# Altium PCB RigadoBreakout_REV_3cbDoc.PcbDoc
Units mil, origin at the board's own origin, x right, y up, seen from the top; angles counter-clockwise.
Board outline 900 x 1080 mil, 4 copper layers (Top Layer, Signal Layer 1, Signal Layer 2, Bottom Layer), stack 30.634 mil thick; 15 components, 29 nets, 113 pads, 13 vias.
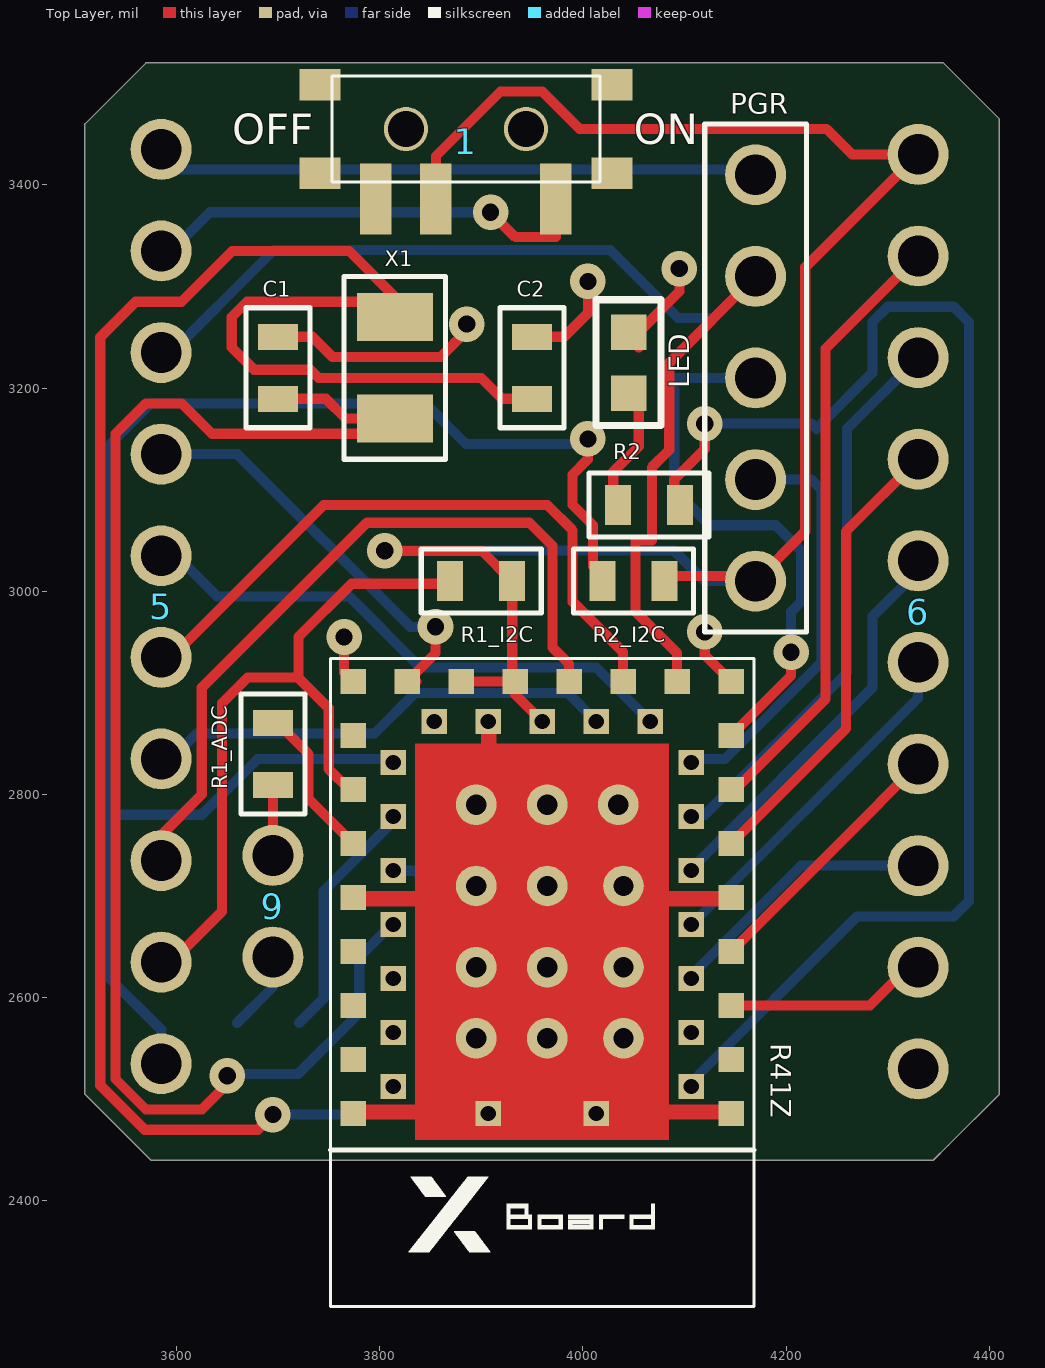
[diagram p0: Top Layer view]
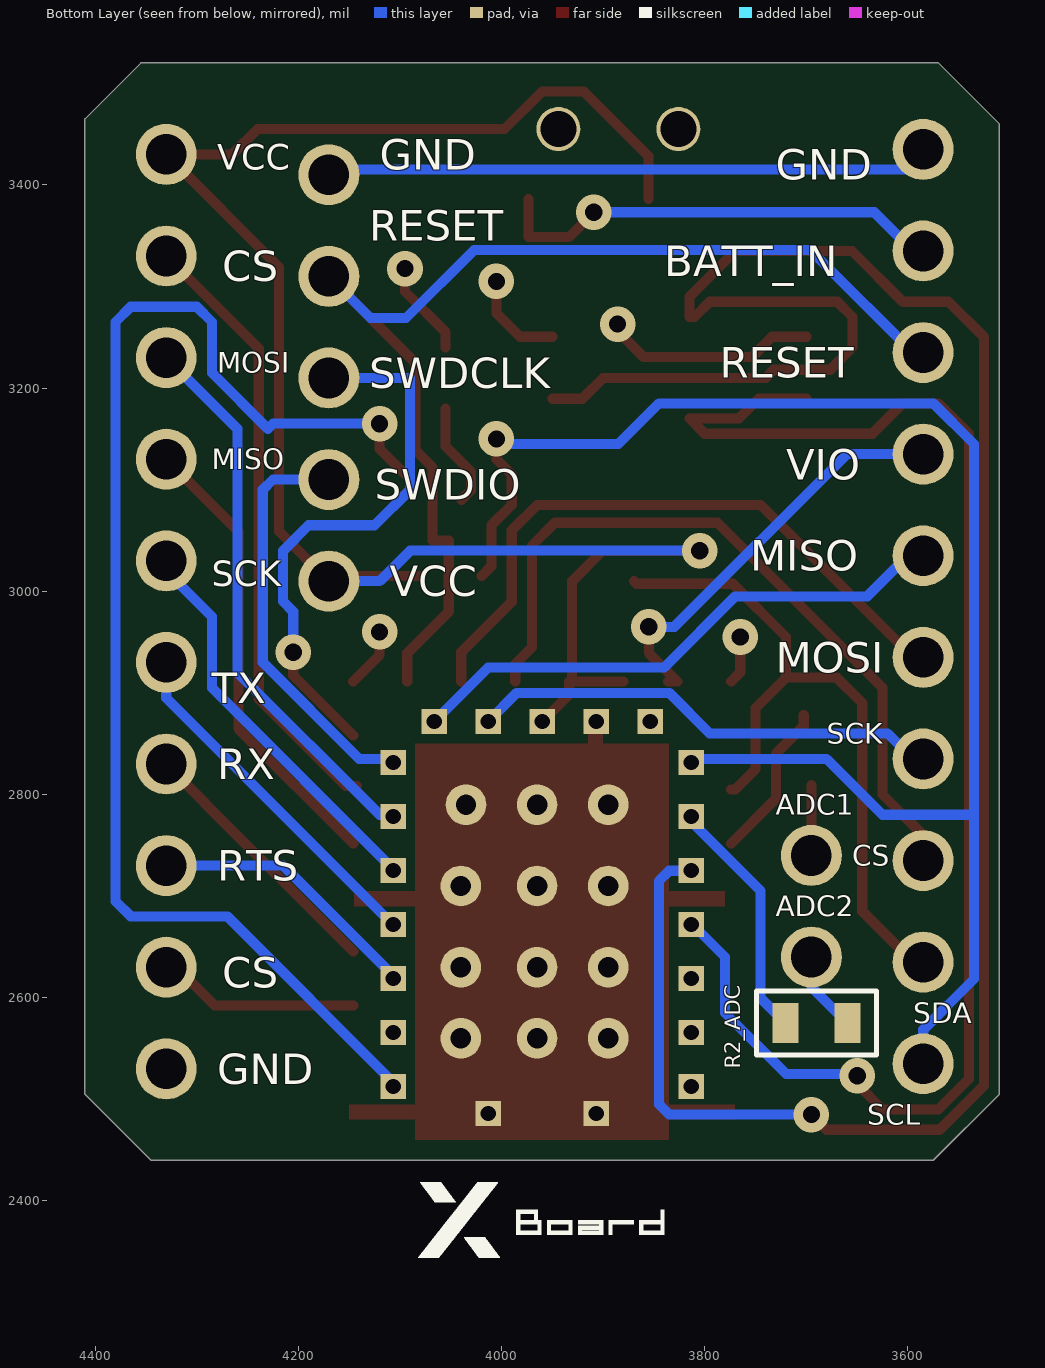
[diagram p1: Bottom Layer view, seen from below]
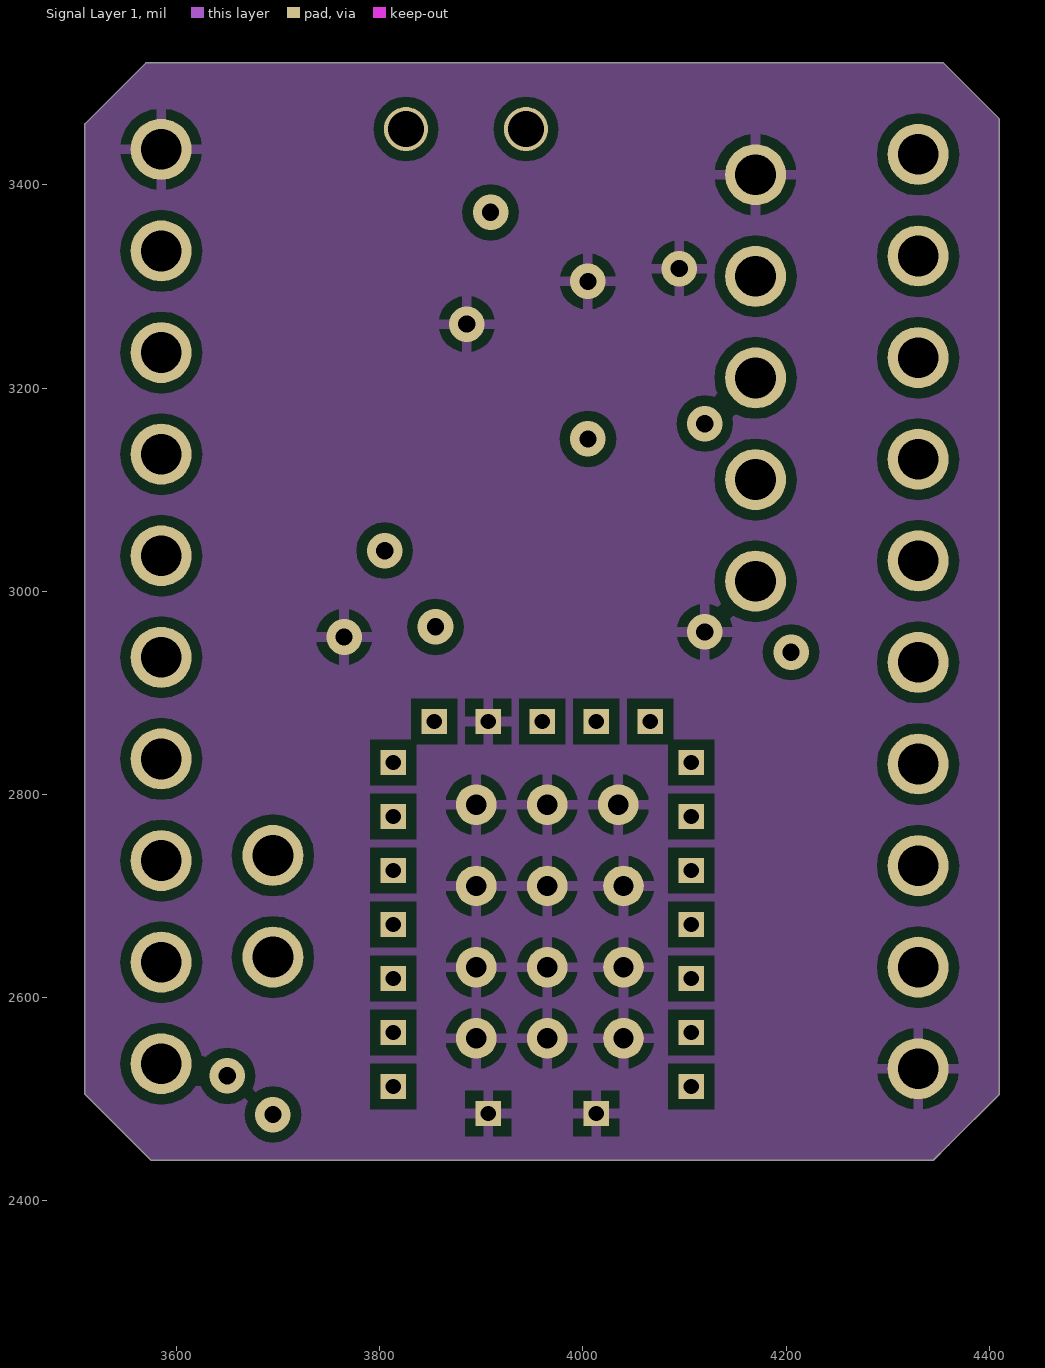
[diagram p2: Signal Layer 1]
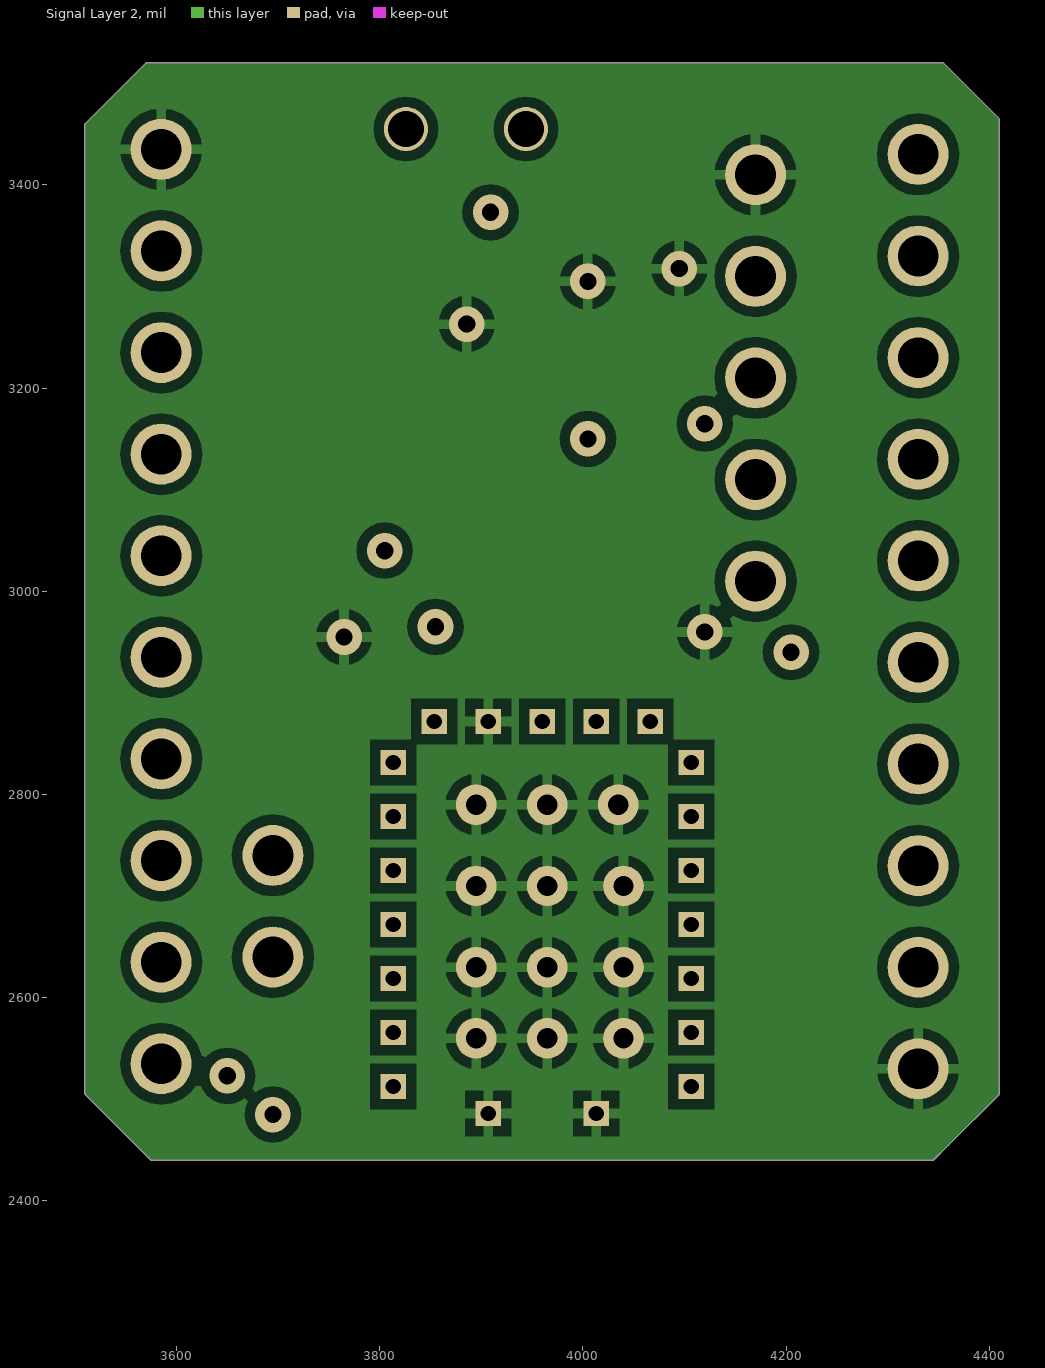
[diagram p3: Signal Layer 2]

## Layer stack, top to bottom
Top Solder: solder mask 0.4, Solder Resist, Dk 3.5
Top Layer: signal copper 1.4
Dielectric 1: core 10, FR-4, Dk 4.2
Signal Layer 1: signal copper 1.417
Dielectric 4: prepreg 5, Dk 4.2
Signal Layer 2: signal copper 1.417
Dielectric 2: core 10, Dk 4.2
Bottom Layer: signal copper 1.4
Bottom Solder: solder mask 0.4, Solder Resist, Dk 3.5

## Board outline
3510,2505 3510,3460 3570,3520 4355,3520 4410,3465 4410,2505 4360,2455 4345,2440 3575,2440

## Design rules (kind name [scope] priority, off if disabled: settings)
Clearance Clearance_6 [InNamedPolygon('GND PLANE2')] p1: gap=10
Clearance Clearance_5 [InNamedPolygon('GND PLANE')] p2: gap=10
Clearance Clearance_4 [InNamedPolygon('GND PLANE2')] p3: gap=20
Clearance Clearance_3 [InNamedPolygon('GND PLANE')] p4: gap=20
Clearance Clearance_2 [InNamedPolygon('GND PLANE')] p5: gap=10
Clearance Clearance_1 [InNamedPolygon('GND PLANE')] p6: gap=20
Clearance [All] p7: gap=5
PolygonConnect [All] p1: connectstyle=Relief reliefconductorwidth=10 reliefentries=4 polygonreliefangle="90 Angle" airgapwidth=10
RoomDefinition RigadoBreakout [InComponentClass('RigadoBreakout')] p1: confinementstyle=ConfineIn formatcopy=TRUE lockcomponents=FALSE outline 0,0 2000,0 2000,1000 0,1000
RoutingVias [All] p1: holewidth=17 width=35 viastyle="Through Hole" minholewidth=15 minwidth=30 maxholewidth=20 maxwidth=40
SolderMaskExpansion [All] p1: expansion=4
UnpouredPolygon [All] p1: allowunpoured=FALSE
Width [All] p1: maxlimit=10 minlimit=10 preferedwidth=10
29 further rules are at their usual default settings.

## Components (designator, comment, footprint, x,y, rotation, side; value= is the part's Value field where it differs from the comment)
1 "Power Switch" "SMT_SWITCH - duplicate" 3885,3455 r180 top
5 "Pin Breakout" 10Pin_Breakout 3585,3435 r180 top
6 "Pin Breakout" 10Pin_Breakout 4330,3430 r180 top
9 "ADC Breakout" "ADC Breakout" 3695,2740 r180 top
C1 "Cap" "0603/1608 SMD Resistor" 3700,3220 r270 top
C2 "Cap" "0603/1608 SMD Resistor" 3950,3220 r90 top
LED "LED" SMD0603 4045,3225 r90 top (schematic designator 2)
PGR "Programmer" Programmer 4170,3010 r0 top (schematic designator A)
R1_ADC "0603 Res" "0603/1608 SMD Resistor" 3695,2840 r270 top
R1_I2C "0603 Res" "0603/1608 SMD Resistor" 3900,3010 r180 top (schematic designator R3)
R2 "0603 Res" "0603/1608 SMD Resistor" 4065,3085 r0 top
R2_ADC "0603 Res" "0603/1608 SMD Resistor" 3690,2575 r180 bottom
R2_I2C "0603 Res" "0603/1608 SMD Resistor" 4050,3010 r180 top (schematic designator R4)
R41Z "Rigado R41Z" RigadoR41Z 3960,2615 r90 top (schematic designator *)
X1 "32.768kHz Oscillator Crystal" Oscillator 3815,3170 r90 top

## Footprints (in the part's own frame and the unit in brackets; to place one, negate y for a bottom-side part, rotate by r counter-clockwise, add the part's x,y. Pads: shape width x height; smd on the part's side, far side on the other; paste and mask are expansions set on the pad)
10Pin_Breakout [mil]
  round 60 hole 40: 1(0,0) 1(0,0) 2(0,100) 3(0,200) 4(0,300) 5(0,400) 6(0,500) 7(0,600) 8(0,700) 9(0,800) 10(0,900)
"0603/1608 SMD Resistor" [mm]
  rect 0.65x1 smd: 1(0.775,0) 2(-0.775,0)
  silkscreen extent -1.5,-0.8 1.5,0.8
"ADC Breakout" [mil]
  round 60 hole 40: 1(0,0) 2(0,100)
Oscillator [mm]
  rect 1.2x1.9 smd: 1(0,0) 2(2.54,0)
  silkscreen extent -1.02,-1.27 3.56,1.27
Programmer [mil]
  round 60 hole 40: 1(0,0) 2(0,100) 3(0,200) 4(0,300) 5(0,400)
  silkscreen extent -50,-50 50,450
RigadoR41Z [mm]
  rect 0.635x0.635 smd: 1(-3.275,-4.725) 3(-1.925,-4.725) 5(-0.575,-4.725) 7(0.775,-4.725) 9(2.125,-4.725) 11(3.475,-4.725) 13(4.825,-4.725) 15(6.175,-4.725) 16(7.525,-4.725) 17(7.525,-3.375) 19(7.525,-2.025) 21(7.525,-0.675) 23(7.525,0.675) 25(7.525,2.025) 27(7.525,3.375) 28(7.525,4.725) 29(6.175,4.725) 31(4.825,4.725) 33(3.475,4.725) 35(2.125,4.725) 37(0.775,4.725) 39(-0.575,4.725) 41(-1.925,4.725) 43(-3.275,4.725)
  rect 0.635x0.635 hole 0.381 paste+0: 2(-2.6,-3.725) 4(-1.25,-3.725) 6(0.1,-3.725) 8(1.45,-3.725) 10(2.8,-3.725) 12(4.15,-3.725) 14(5.5,-3.725) 18(6.525,-2.7) 20(6.525,-1.35) 22(6.525,0) 24(6.525,1.35) 26(6.525,2.7) 30(5.5,3.725) 32(4.15,3.725) 34(2.8,3.725) 36(1.45,3.725) 38(0.1,3.725) 40(-1.25,3.725) 42(-2.6,3.725) 44(-3.275,1.35) 45(-3.275,-1.35)
  silkscreen extent -8.1,-5.3 8.1,5.3
SMD0603 [mil]
  rect 35x35 smd: 1(-30,0) 2(30,0)
  silkscreen extent -62,-32 62,32, body extent -31,-16 32,16, height 18
"SMT_SWITCH - duplicate" [mil]
  rect 31x70 smd: 0(-88.58,68.9) 1(29.53,68.9) 2(88.58,68.9)
  rect 40x31 smd: M(-143.7,-43.5) M(-143.7,43.5) M(143.7,-43.5) M(143.7,43.5)
  round 43.31 hole 35.43 unplated: M(-59.06,0) M(59.06,0)
  silkscreen extent -132,-52 132,52

## Part data
C1 C2: library part "Capacitor Ceramic", "Ceramic Chip Capacitor"
X1: "32.768kHz Crystal Oscillator.  Note that this requires load capacitors"

## Free pads (board coordinates)
  round 40 hole 20: 1(3895,2560) 1(3895,2630) 1(3895,2710) 1(3895,2790) 1(3965,2560) 1(3965,2630) 1(3965,2710) 1(3965,2790) 1(4035,2790) 1(4040,2560) 1(4040,2630) 1(4040,2710)

## Via types
v1: diameter 35, hole 17, Top Layer to Bottom Layer, 13 vias

## Nets (pads, with @x,y where several pads share a name; then routed paths per layer and width w, separated by ;. In a path a pad name is that pad's centre, name@x,y a point inside that pad or via, vN(x,y) a via of type N, cw(c..) or ccw(c..) an arc to the next point about the centre after c; other vN are vias at no path point)
ADC1: R1_ADC.2 R41Z.33 | length 155.8
  Top Layer w10: R1_ADC.2@3702.5,2878.01 3702.5,2867.5 3730,2840 3730,2795.78 R41Z.33
ADC2: R2_ADC.2 R41Z.32 | length 239.1
  Bottom Layer w10: R2_ADC.2 3745,2599.49 3745,2705 R41Z.32@3815,2775
BATT_IN: 1.0 5.2 | length 456.1
  Top Layer w10: v1(3909.18,3373) 3933.58,3348.6 3973.58,3348.6 1.0
  Bottom Layer w10: 5.2@3585,3325 3633,3373 v1(3909.18,3373)
GND: 5.1 6.10 C1.2 C2.1 LED.2 pad.1 PGR.5 R41Z.1 R41Z.9 R41Z.16 R41Z.24 R41Z.28 R41Z.35 R41Z.43 R41Z.44 R41Z.45 | length 1092.7
  Top Layer w10: C1.2 3733.83,3250.51 3753.83,3230.51 3860,3230.51 3885.79,3256.3 v1(3885.79,3263) ; v1(3765,2955) 3765,2920.23 R41Z.28 ; C2.1 3981.82,3250.51 4005,3273.7 v1(4005,3305) ; LED.2@4055,3240 4055,3255 4095,3295 v1(4095,3317.61) ; v1(4120,2960) 4120,2937.28 R41Z.16
  Bottom Layer w10: 5.1@3585,3425 3585,3415 4145,3415 PGR.5@4155,3425
I2C_SCL: 5.10 R2_I2C.1 R41Z.30 | length 1602.1
  Top Layer w10: v1(4005,3150) 4005,3130 3990,3115 3990,3085 4010,3065 4010,3024.49 R2_I2C.1@4019.49,3015
  Bottom Layer w10: 3535,2780 3625,2780 3680,2835 R41Z.30@3815,2835 ; 5.10@3585,2525 3585,2568.43 3535,2618.43 3535,3145 3575,3185 3845,3185 3885,3145 4000,3145 v1(4005,3150)
I2C_SDA: 5.9 R1_I2C.1 R41Z.31 | length 722.2
  Top Layer w10: 5.9@3585,2625 3645,2685 3645,2890 3670,2915 3720,2915 ; R41Z.31 3770.04,2804.96 3750,2825 3750,2885 3720,2915 ; R1_I2C.1 3866.99,3007.5 3772.5,3007.5 3720,2955 3720,2915
LED: R2.1 R41Z.2 | length 1358.6
  Top Layer w10: R2.1@4100.51,3090 4090,3100.51 4090,3110 4120,3140 v1(4120,3165)
  Bottom Layer w10: R41Z.2@4105,2515 4270,2680 4365,2680 4380,2695 4380,3265 4365,3280 4300,3280 4285,3265 4285,3215 4230,3160 4225,3165 v1(4120,3165)
Net5_5: 5.5 R41Z.18 | length 519.7
  Bottom Layer w10: 5.5@3610,3025 3640,2995 3770,2995 3840,2925 4013.19,2925 R41Z.18
Net5_6: 5.6 R41Z.19 | length 651
  Top Layer w10: 5.6@3585,2925 3745,3085 3965,3085 3990,3060 3990,2989.72 4039.72,2940 R41Z.19
Net5_7: 5.7 R41Z.20 | length 470.9
  Bottom Layer w10: 5.7@3585,2825 3620,2860 3795,2860 3835,2900 3985.04,2900 R41Z.20
Net5_8: 5.8 R41Z.21 | length 748.8
  Top Layer w10: 5.8 3585,2760 3625,2800 3625,2905 3787.5,3067.5 3947.5,3067.5 3970,3045 3970,2945 3986.57,2928.43 R41Z.21
Net6_2: 6.2 R41Z.13 | length 605.6
  Top Layer w10: R41Z.13@4142.55,2808.43 4153.43,2808.43 4239,2894 4239,3239 6.2
Net6_3: 6.3 R41Z.12 | length 547
  Bottom Layer w10: R41Z.12@4110,2780 4120,2780 4260,2920 4260,3160 6.3
Net6_4: 6.4 R41Z.11 | length 454.4
  Top Layer w10: R41Z.11 4259,2864.79 4259,3059 6.4
Net6_5: 6.5 R41Z.10 | length 398.2
  Bottom Layer w10: R41Z.10@4105,2725 4285,2905 4285,2975 4330,3020 6.5
Net6_6: 6.6 R41Z.8 | length 353.2
  Bottom Layer w10: R41Z.8@4105,2670 4330,2895 6.6
Net6_7: 6.7 R41Z.7 | length 260.7
  Top Layer w10: R41Z.7 4292.51,2792 4292.51,2792.51 6.7
Net6_8: 6.8 R41Z.6 | length 270.6
  Bottom Layer w10: R41Z.6@4105,2620 4215,2730 6.8
Net6_9: 6.9 R41Z.5 | length 199.6
  Top Layer w10: R41Z.5 4282.36,2592.36 4320,2630 6.9
Net9_1: 9.1 R1_ADC.1 | length 59.5
  Top Layer w10: 9.1@3695,2750 R1_ADC.1
Net9_2: 9.2 R2_ADC.1 | length 79.7
  Bottom Layer w10: R2_ADC.1 3695,2610.51 9.2
NetC1_1: C1.1 R41Z.36 X1.1 | length 1475.7
  Top Layer w10: v1(3650,2523.05) 3650,2515 3625,2490 3570,2490 3540,2520 3540,3155 3570,3185 3605,3185 3635,3155 3800,3155 X1.1 3766.49,3170 3747,3189.49 C1.1
  Bottom Layer w10: v1(3650,2523.05) 3650,2521.11 3646.11,2525 3720,2525 3780,2585 3780,2640 R41Z.36@3815,2675
NetC2_2: C2.2 R41Z.34 X1.2 | length 2227.1
  Top Layer w10: v1(3695,2485) 3680,2470 3568.79,2470 3525,2513.79 3525,3250 3560,3285 3605,3285 3655,3335 3770,3335 3815,3290 X1.2 3810,3270 3795,3285 3669.49,3285 3654.49,3270 3654.49,3240 3676.49,3218 3732,3218 3740,3210 3900,3210 3920.51,3189.49 C2.2
  Bottom Layer w10: v1(3695,2485) 3835,2485 3845,2495 3845,2715 3835,2725 R41Z.34@3810,2725
NetLED_1: LED.1 R2.2 | length 104.3
  Top Layer w10: R2.2@4039.49,3090 4030,3099.49 4030,3117.51 4055,3142.51 LED.1@4055,3180
RESET: 5.3 PGR.4 R41Z.17 | length 1149.6
  Top Layer w10: R41Z.17 4092.87,2939.13 4052,2980 4052,3050 4068,3050 4068,3122 4085,3139 4085,3225 PGR.4
  Bottom Layer w10: 5.3@3585,3225 3696,3336 4027,3336 4094,3269 4129,3269 PGR.4
SWDCLK: PGR.3 R41Z.15 | length 550.3
  Top Layer w10: R41Z.15 4205,2917.09 v1(4205,2940)
  Bottom Layer w10: PGR.3 4090,3210 4090,3100 4125,3065 4190,3065 4215,3040 4215,2990 4205,2980 v1(4205,2940)
SWDIO: PGR.2 R41Z.14 | length 403.5
  Bottom Layer w10: R41Z.14@4110,2835 4140,2835 4235,2930 4235,3100 4225,3110 PGR.2
VCC: 1.1 6.1 PGR.1 R1_I2C.2 R2_I2C.2 R41Z.22 R41Z.23 R41Z.25 | length 1865.6
  Top Layer w10: v1(3805,3040) 3805.31,3039.69 3900.83,3039.69 R1_I2C.2 3930.51,2914.17 R41Z.23 ; 1.1 3855.47,3428.47 3919,3492 3960,3492 3997,3455 4240,3455 4265,3430 4330,3430 4219,3319 4219,3059 PGR.1 4165,3015 R2_I2C.2@4080.51,3015 ; R41Z.25 R41Z.23 ; R41Z.22 3933.42,2898.47 R41Z.23
  Bottom Layer w10: v1(3805,3040) 4090,3040 4120,3010 PGR.1
VIO: 5.4 R41Z.27 | length 414.8
  Top Layer w10: R41Z.27@3836.26,2911.26 R41Z.27 3855,2939.14 v1(3855,2965)
  Bottom Layer w10: 5.4 3660,3135 3830,2965 v1(3855,2965)
pads on no net: 1.2 1.M R41Z.3 R41Z.4 R41Z.26 R41Z.29 R41Z.37 R41Z.38 R41Z.39 R41Z.40 R41Z.41 R41Z.42

## Polygon pours and split planes (outlines as drawn)
GND on Signal Layer 1 "GND PLANE" (solid, pour order 12): 3510,2505 3510,3460 3570,3520 4355,3520 4410,3465 4410,2505 4360,2455 4345,2440 3575,2440
GND on Signal Layer 2 "GND PLANE2" (solid, pour order 13): 3510,2505 3510,3460 3570,3520 4355,3520 4410,3465 4410,2505 4360,2455 4345,2440 3575,2440

## Other copper
Top Layer:
  rectangle net GND: 3770,2480 3850,2495
  rectangle net GND: 3835,2460 4085,2850
  rectangle net GND: 3780,2690 3860,2705
  region net GND: 3915,2800 3915,2880 3900,2880 3900,2800
  rectangle net GND: 4070,2480 4150,2495
  rectangle net GND: 4065,2690 4145,2705

## Silkscreen, mask and mechanical layers (free items; w line width, h text height)
Top Overlay:
  drawing of 1559 lines, arcs and shapes, not listed
  text "OFF" at 3655,3440 h30
  text "ON" at 4050,3440 h30
Bottom Overlay:
  drawing of 1559 lines, arcs and shapes, not listed
  text "GND" at 4120,3415 h30
  text "VCC" at 4280,3415 h25
  text "GND" at 3730,3405 h30
  text "RESET" at 4130,3345 h30
  text "BATT_IN" at 3840,3310 h30
  text "CS" at 4275,3305 h30
  text "MOSI" at 4280,3215 h20
  text "RESET" at 3785,3210 h30
  text "SWDCLK" at 4130,3200 h30
  text "MISO" at 4285,3120 h20
  text "VIO" at 3720,3110 h30
  text "SWDIO" at 4125,3090 h30
  text "MISO" at 3755,3020 h30
  text "SCK" at 4285,3005 h25
  text "VCC" at 4110,2995 h30
  text "MOSI" at 3730,2920 h30
  text "TX" at 4285,2890 h30
  text "SCK" at 3680,2850 h20
  text "RX" at 4280,2815 h30
  text "ADC1" at 3730,2780 h20
  text "CS" at 3655,2730 h20
  text "RTS" at 4280,2715 h30
  text "ADC2" at 3730,2680 h20
  text "CS" at 4275,2610 h30
  text "SDA" at 3595,2575 h20
  text "GND" at 4280,2515 h30
  text "SCL" at 3640,2475 h20
Mechanical 1:
  the board outline again, w5